# Altium PCB 極限開關.PCBDOC
Units mil, origin at the board's own origin, x right, y up, seen from the top; angles counter-clockwise.
Board outline 6000 x 4000 mil, 2 copper layers (Top Layer, Bottom Layer); 6 components, 4 nets, 14 pads, 0 vias.
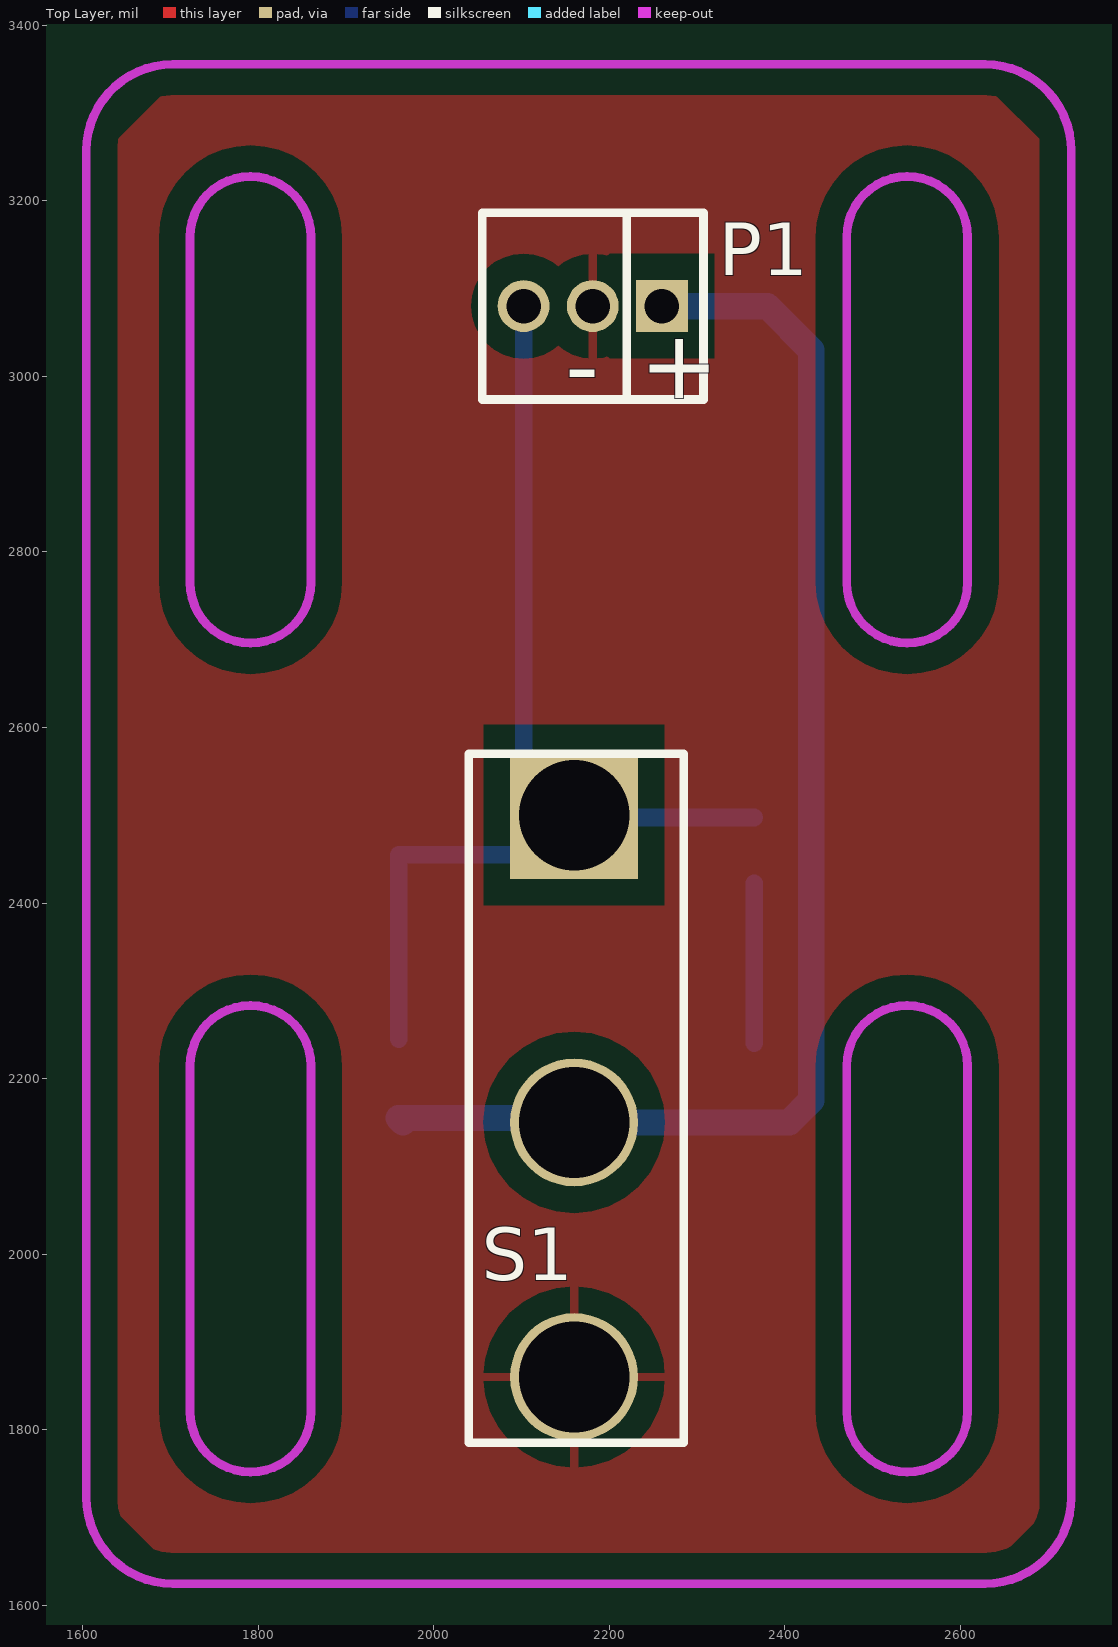
[diagram p0: Top Layer view]
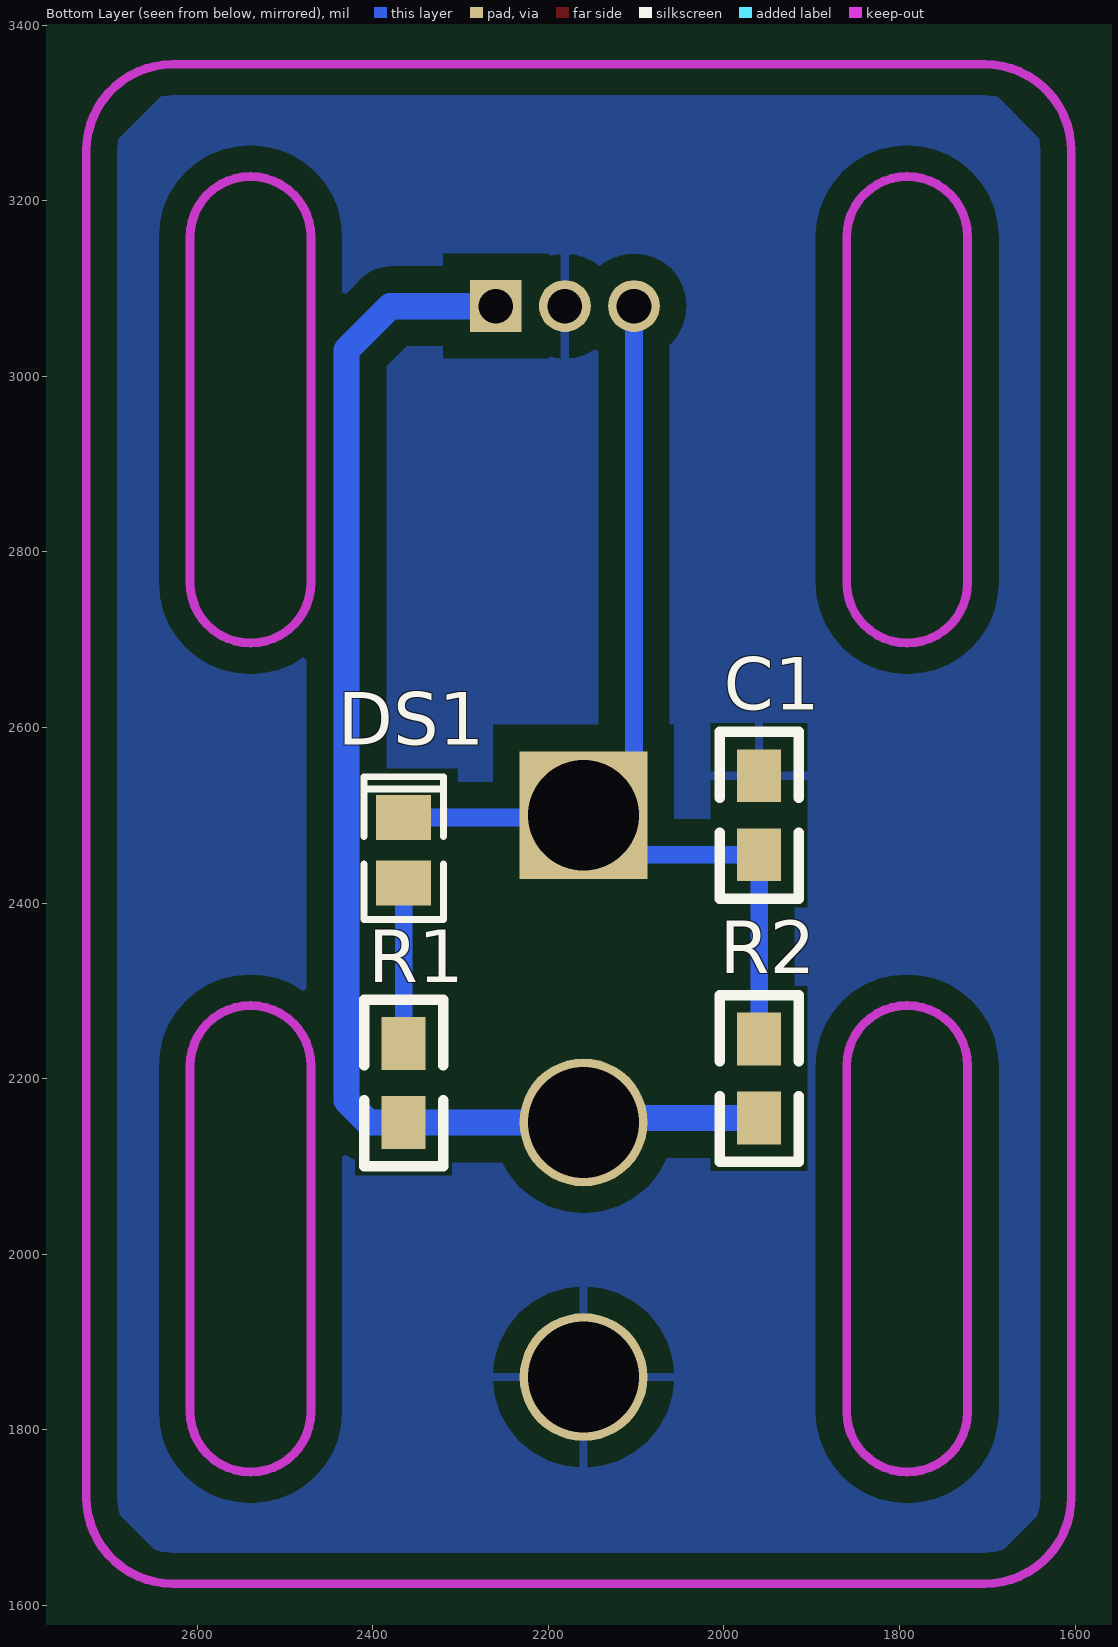
[diagram p1: Bottom Layer view, seen from below]

## Layer stack, top to bottom
Top Layer: signal copper 1.4
Dielectric: dielectric 12.6, FR-4, Dk 4.8
Bottom Layer: signal copper 1.4

## Board outline
1000,1000 7000,1000 7000,5000 1000,5000

## Design rules (kind name [scope] priority, off if disabled: settings)
Clearance [All] p1: gap=10
ComponentClearance [All] p1: gap=10 collisioncheckmode=0
HoleSize [All] p1: absolutevalues=TRUE maxlimit=150 minlimit=1 maxpercent=80.000 minpercent=20.000
PolygonConnect [All] p1: connectstyle=Relief reliefconductorwidth=10 reliefentries=4 polygonreliefangle="90 Angle"
RoutingVias [All] p1: holewidth=28 width=50 viastyle="Through Hole" minholewidth=19.68 minwidth=27.56 maxholewidth=28 maxwidth=50
SolderMaskExpansion [All] p1: expansion=4
TestPointUsage [All] p1: valid=0 allowmultiple=FALSE
Testpoint [All] p1: side=15 testpointundercomponent=TRUE minsize=40 maxsize=100 preferedsize=60 minholesize=0 maxholesize=40 preferedholesize=32 testpointgrid=1 style=1023 order=1234567890
Width power [InNetClass('power')] p1: maxlimit=30 minlimit=10 preferedwidth=30
Width [All] p2: maxlimit=30 minlimit=10 preferedwidth=20
16 further rules are at their usual default settings.

## Classes and differential pairs
net class power: GND VCC

## Components (designator, comment, footprint, x,y, rotation, side; value= is the part's Value field where it differs from the comment)
C1 "Cap" 0805 1960,2545 r270 bottom
DS1 "LED3" "SMD _LED" 2365,2460 r270 bottom
P1 "Header 3" "2mm 3pin" 2260,3080 r180 top
R1 "Res1" 0805 2365,2240 r270 bottom
R2 "Res1" 0805 1960,2245 r270 bottom
S1 "switch" switch 2160,2500 r0 top

## Footprints (in the part's own frame and the unit in brackets; to place one, negate y for a bottom-side part, rotate by r counter-clockwise, add the part's x,y. Pads: shape width x height; smd on the part's side, far side on the other; paste and mask are expansions set on the pad)
"2mm 3pin" [mm]
  rect 1.5x1.5 hole 1: 1(0,0)
  round 1.5 hole 1: 2(2,0) 3(4,0)
  silkscreen extent -1.2,-2.7 5.2,2.7
0805 [mil]
  rect 60x50 smd: 1(0,0) 2(90,0)
  silkscreen extent -50,-45 140,45
"SMD _LED" [mm] "SMT LED; 2 Leads"
  rect 1.3x1.6 smd: 1(0.95,0) 2(-0.95,0)
  silkscreen extent -2.13,-1.15 2,1.15
switch [mm]
  rect 3.7x3.7 hole 3.2: 1(0,0)
  round 3.7 hole 3.2: 2(0,-16.256) 3(0,-8.89)
  silkscreen extent -3.05,-18.16 3.17,1.78

## Part data
C1: "Capacitor"
DS1: library part LED0, "Typical INFRARED GaAs LED"
P1: "Header, 3-Pin"
R1 R2: "Resistor"
S1: "SPDT Subminiature Toggle Switch, Right Angle Mounting, Vertical Actuation"

## Nets (pads, with @x,y where several pads share a name; then routed paths per layer and width w, separated by ;. In a path a pad name is that pad's centre, name@x,y a point inside that pad or via, vN(x,y) a via of type N, cw(c..) or ccw(c..) an arc to the next point about the centre after c; other vN are vias at no path point)
GND: C1.1 P1.2 S1.2
NetC1_2: C1.2 DS1.2 P1.3 R2.1 S1.1 | length 1240.7
  Bottom Layer w20: R2.1 C1.2 2120.35,2455 S1.1@2165.35,2500 ; P1.3 2102.52,2562.83 2167.95,2497.4 DS1.2
NetDS1_1: DS1.1 R1.1 | length 182.6
  Bottom Layer w20: R1.1 DS1.1
VCC: P1.1 R1.2 R2.2 S1.3 | length 1535.2
  Bottom Layer w30: R2.2@1965,2150 R2.2 2155,2155 S1.3 2405,2150 2430,2175 2430,3030 2380,3080 P1.1

## Polygon pours and split planes (outlines as drawn)
GND on Top Layer (solid, remove dead copper): 1690,3320 1640,3270 1640,1705 1685,1660 2650,1660 2690,1700 2690,3270 2640,3320
GND on Bottom Layer (solid, remove dead copper): 1700,3330 1635,3265 1635,1710 1700,1645 2630,1645 2700,1715 2700,3260 2630,3330

## Keep-outs
Keep-Out Layer:
  lines w10: 1604.33,1723.03 ccw(c1702.76,1723.03) 1702.76,1624.61 2627.95,1624.61 ccw(c2627.95,1723.03) 2726.38,1723.03 2726.38,3256.97 ccw(c2627.95,3256.97) 2627.95,3355.39 1702.76,3355.39 ccw(c1702.76,3256.97) 1604.33,3256.97 1604.33,1723.03 ; 1722.44,1820.63 ccw(c1791.34,1820.63) 1860.24,1820.63 1860.24,2214.33 ccw(c1791.34,2214.33) 1722.44,2214.33 1722.44,1820.63 ; 1722.44,2765.04 ccw(c1791.34,2765.04) 1860.24,2765.04 1860.24,3158.74 ccw(c1791.34,3158.74) 1722.44,3158.74 1722.44,2765.04 ; 2470.47,1820.63 ccw(c2539.37,1820.63) 2608.27,1820.63 2608.27,2214.33 ccw(c2539.37,2214.33) 2470.47,2214.33 2470.47,1820.63 ; 2470.47,2765.04 ccw(c2539.37,2765.04) 2608.27,2765.04 2608.27,3158.74 ccw(c2539.37,3158.74) 2470.47,3158.74 2470.47,2765.04

## Silkscreen, mask and mechanical layers (free items; w line width, h text height)
Top Overlay:
  text "+" at 2235,2975 h78.74
  text "-" at 2150,2973.7 h78.74